# Altium PCB AT32.PcbDoc (part 3 of 9)
Units mm, origin at the board's own origin, x right, y up, seen from the top; angles counter-clockwise.
Board outline 152.1 x 84.6 mm, 2 copper layers (Top Layer, Bottom Layer); 49 components, 58 nets, 223 pads, 0 vias.
Unrouted connection lines stored in the file: 3.
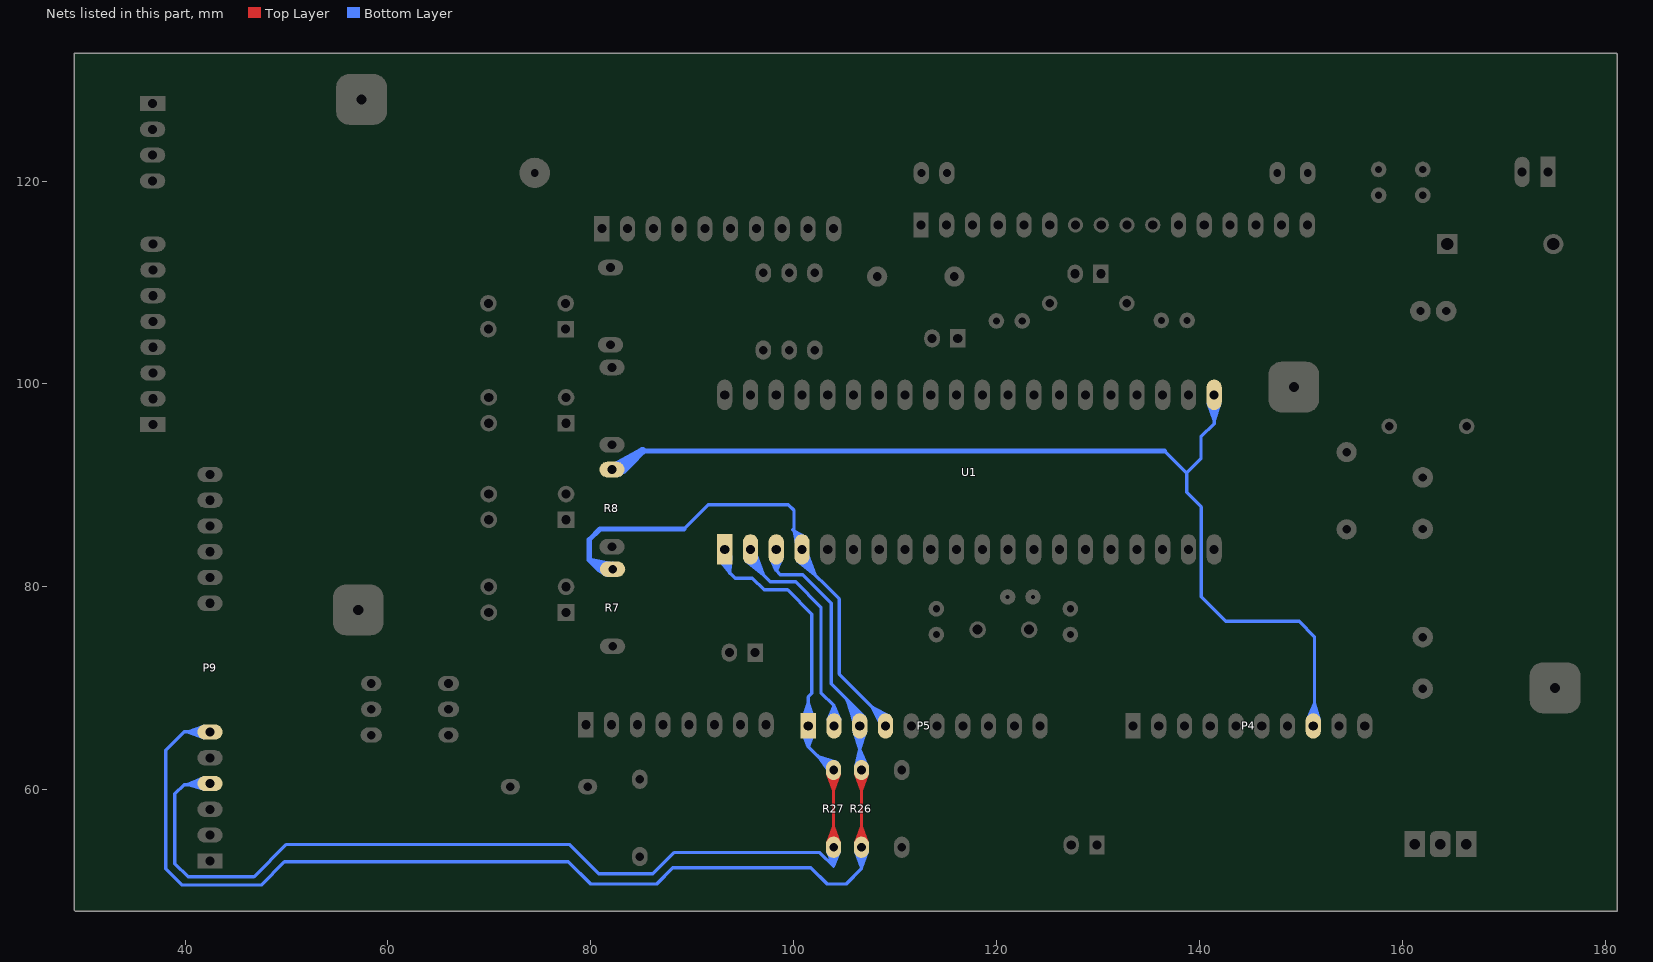
[diagram p3: the nets of this part, all layers, seen from the top]

## Nets (pads, with @x,y where several pads share a name; then routed paths per layer and width w, separated by ;. In a path a pad name is that pad's centre, name@x,y a point inside that pad or via, vN(x,y) a via of type N, cw(c..) or ccw(c..) an arc to the next point about the centre after c; other vN are vias at no path point) (continued)
NetP4_8: P4.8 R8.1 U1.21 | length 277.8
  Bottom Layer w0.33: R8.1@82.092,91.966 R8.1@82.558,91.5 ; 136.541,93.4 138.747,91.194 138.747,89.314 140.186,87.875 140.186,79.026 142.62,76.592 149.857,76.592 151.35,75.099 P4.8@151.35,66.312 ; 138.82,91.294 140.166,92.639 140.166,94.786 141.466,96.086 U1.21@141.466,98.927 ; U1.21@141.052,97.763 cw(c140.054,96.765) 141.466,96.765 cw(c142.878,96.765) U1.21@141.88,97.763 ; P4.8@150.822,67.2 ccw(c149.548,68.474) 151.35,68.474 ; P4.8@151.056,66.966 ccw(c150.345,67.677) 151.35,67.677 ; 151.35,67.923 ccw(c152.373,67.923) P4.8@151.65,67.2 ; U1.21@140.889,98.079 141.466,96.437 ; U1.21@140.889,98.079 141.466,96.437 ; U1.21@140.889,98.079 141.466,96.437 ; U1.21@140.889,98.079 141.466,96.437 ; U1.21@140.889,98.079 141.466,96.437 ; U1.21@140.889,98.079 141.466,96.437 ; U1.21@140.889,98.079 141.466,96.437 ; U1.21@141.212,98.158 141.466,96.437 ; U1.21@141.212,98.158 141.466,96.437 ; U1.21@141.212,98.158 141.466,96.437 ; U1.21@141.212,98.158 141.466,96.437 ; U1.21@141.212,98.158 141.466,96.437 ; U1.21@141.212,98.158 141.466,96.437 ; U1.21@141.212,98.158 141.466,96.437 ; 141.466,96.437 U1.21@142.043,98.079 ; 141.466,96.437 U1.21@141.72,98.158 ; 141.466,96.437 U1.21@141.466,98.177 ; 141.466,96.437 U1.21@142.043,98.079 ; 141.466,96.437 U1.21@141.72,98.158 ; 141.466,96.437 U1.21@141.466,98.177 ; 141.466,96.437 U1.21@142.043,98.079 ; 141.466,96.437 U1.21@141.72,98.158 ; 141.466,96.437 U1.21@141.466,98.177 ; 141.466,96.437 U1.21@142.043,98.079 ; 141.466,96.437 U1.21@141.72,98.158 ; 141.466,96.437 U1.21@141.466,98.177 ; 141.466,96.437 U1.21@142.043,98.079 ; 141.466,96.437 U1.21@141.72,98.158 ; 141.466,96.437 U1.21@141.466,98.177 ; 141.466,96.437 U1.21@142.043,98.079 ; 141.466,96.437 U1.21@141.72,98.158 ; 141.466,96.437 U1.21@141.466,98.177 ; 141.466,96.437 U1.21@142.043,98.079 ; 141.466,96.437 U1.21@141.72,98.158 ; 141.466,96.437 U1.21@141.466,98.177 ; P4.8@150.667,66.921 151.35,68.53 ; P4.8@150.667,66.921 151.35,68.53 ; P4.8@150.667,66.921 151.35,68.53 ; P4.8@150.667,66.922 151.35,68.525 ; P4.8@150.667,66.921 151.35,68.53 ; P4.8@150.667,66.921 151.35,68.53 ; P4.8@150.667,66.921 151.35,68.53 ; P4.8@150.983,66.821 151.35,68.53 ; P4.8@150.983,66.821 151.35,68.53 ; P4.8@150.983,66.821 151.35,68.53 ; P4.8@150.983,66.821 151.35,68.525 ; P4.8@150.983,66.821 151.35,68.53 ; P4.8@150.983,66.821 151.35,68.53 ; P4.8@150.983,66.821 151.35,68.53 ; P4.8@151.236,66.786 151.35,68.53 ; P4.8@151.236,66.786 151.35,68.53 ; P4.8@151.236,66.786 151.35,68.53 ; P4.8@151.236,66.786 151.35,68.525 ; P4.8@151.236,66.786 151.35,68.53 ; P4.8@151.236,66.786 151.35,68.53 ; P4.8@151.236,66.786 151.35,68.53 ; 151.35,68.525 P4.8@151.818,66.846 ; 151.35,68.525 P4.8@151.491,66.788 ; 151.35,68.53 P4.8@151.818,66.846 ; 151.35,68.53 P4.8@151.491,66.788 ; 151.35,68.53 P4.8@151.818,66.846 ; 151.35,68.53 P4.8@151.491,66.788 ; 151.35,68.53 P4.8@151.818,66.846 ; 151.35,68.53 P4.8@151.491,66.788 ; 151.35,68.53 P4.8@151.818,66.846 ; 151.35,68.53 P4.8@151.491,66.788 ; 151.35,68.53 P4.8@151.818,66.846 ; 151.35,68.53 P4.8@151.491,66.788 ; 151.35,68.53 P4.8@151.818,66.846 ; 151.35,68.53 P4.8@151.491,66.788
  Bottom Layer w0.5: 85.1,93.4 136.541,93.4
  Bottom Layer w0.75: R8.1@82.558,91.5 83.2,91.5 85.1,93.4 ; R8.1@82.572,91.961 ccw(c82.572,94.59) 84.431,92.731 ; R8.1@82.361,91.9 85.1,93.4 ; R8.1@82.361,91.9 85.1,93.4 ; R8.1@82.361,91.9 85.1,93.4 ; R8.1@82.361,91.9 85.1,93.4 ; R8.1@82.361,91.9 85.1,93.4 ; R8.1@82.572,91.566 85.1,93.4 ; R8.1@82.572,91.566 85.1,93.4 ; R8.1@82.572,91.566 85.1,93.4 ; R8.1@82.572,91.566 85.1,93.4 ; R8.1@82.572,91.566 85.1,93.4 ; R8.1@82.824,91.262 85.1,93.4 ; R8.1@82.824,91.262 85.1,93.4 ; R8.1@82.824,91.262 85.1,93.4 ; R8.1@82.824,91.262 85.1,93.4 ; R8.1@82.824,91.262 85.1,93.4
NetP5_1: P5.1 P9.4 R27.1 R27.2 U1.1 | length 613.9
  Top Layer w0.33: R27.1@103.526,55.032 ccw(c102.528,56.03) 103.94,56.03 ccw(c105.352,56.03) R27.1@104.354,55.032 ; R27.2@103.526,61.274 cw(c102.528,60.276) 103.94,60.276 cw(c105.352,60.276) R27.2@104.354,61.274 ; R27.1@103.94,54.24 R27.1@103.94,54.318 R27.2@103.94,61.938 ; R27.1@103.363,54.716 103.94,56.358 ; R27.1@103.363,54.716 103.94,56.358 ; R27.1@103.363,54.716 103.94,56.358 ; R27.1@103.363,54.716 103.94,56.358 ; R27.1@103.363,54.716 103.94,56.358 ; R27.1@103.363,54.716 103.94,56.358 ; R27.1@103.363,54.716 103.94,56.358 ; R27.2@103.363,61.59 103.94,59.948 ; R27.2@103.363,61.59 103.94,59.948 ; R27.2@103.363,61.59 103.94,59.948 ; R27.2@103.363,61.59 103.94,59.948 ; R27.2@103.363,61.59 103.94,59.948 ; R27.2@103.363,61.59 103.94,59.948 ; R27.2@103.363,61.59 103.94,59.948 ; R27.1@103.686,54.637 103.94,56.358 ; R27.1@103.686,54.637 103.94,56.358 ; R27.1@103.686,54.637 103.94,56.358 ; R27.1@103.686,54.637 103.94,56.358 ; R27.1@103.686,54.637 103.94,56.358 ; R27.1@103.686,54.637 103.94,56.358 ; R27.1@103.686,54.637 103.94,56.358 ; R27.2@103.686,61.669 103.94,59.948 ; R27.2@103.686,61.669 103.94,59.948 ; R27.2@103.686,61.669 103.94,59.948 ; R27.2@103.686,61.669 103.94,59.948 ; R27.2@103.686,61.669 103.94,59.948 ; R27.2@103.686,61.669 103.94,59.948 ; R27.2@103.686,61.669 103.94,59.948 ; R27.1@103.94,54.618 103.94,56.358 ; R27.1@103.94,54.618 103.94,56.358 ; R27.1@103.94,54.618 103.94,56.358 ; R27.1@103.94,54.618 103.94,56.358 ; R27.1@103.94,54.618 103.94,56.358 ; R27.1@103.94,54.618 103.94,56.358 ; R27.1@103.94,54.618 103.94,56.358 ; 103.94,56.358 R27.1@104.517,54.716 ; 103.94,56.358 R27.1@104.194,54.637 ; 103.94,56.358 R27.1@104.517,54.716 ; 103.94,56.358 R27.1@104.194,54.637 ; 103.94,56.358 R27.1@104.517,54.716 ; 103.94,56.358 R27.1@104.194,54.637 ; 103.94,56.358 R27.1@104.517,54.716 ; 103.94,56.358 R27.1@104.194,54.637 ; 103.94,56.358 R27.1@104.517,54.716 ; 103.94,56.358 R27.1@104.194,54.637 ; 103.94,56.358 R27.1@104.517,54.716 ; 103.94,56.358 R27.1@104.194,54.637 ; 103.94,56.358 R27.1@104.517,54.716 ; 103.94,56.358 R27.1@104.194,54.637 ; 103.94,59.948 R27.2@104.517,61.59 ; 103.94,59.948 R27.2@104.194,61.669 ; 103.94,59.948 R27.2@103.94,61.688 ; 103.94,59.948 R27.2@104.517,61.59 ; 103.94,59.948 R27.2@104.194,61.669 ; 103.94,59.948 R27.2@103.94,61.688 ; 103.94,59.948 R27.2@104.517,61.59 ; 103.94,59.948 R27.2@104.194,61.669 ; 103.94,59.948 R27.2@103.94,61.688 ; 103.94,59.948 R27.2@104.517,61.59 ; 103.94,59.948 R27.2@104.194,61.669 ; 103.94,59.948 R27.2@103.94,61.688 ; 103.94,59.948 R27.2@104.517,61.59 ; 103.94,59.948 R27.2@104.194,61.669 ; 103.94,59.948 R27.2@103.94,61.688 ; 103.94,59.948 R27.2@104.517,61.59 ; 103.94,59.948 R27.2@104.194,61.669 ; 103.94,59.948 R27.2@103.94,61.688 ; 103.94,59.948 R27.2@104.517,61.59 ; 103.94,59.948 R27.2@104.194,61.669 ; 103.94,59.948 R27.2@103.94,61.688
  Bottom Layer w0.33: 40.306,60.5 ccw(c40.306,62.254) P9.4@41.546,61.014 ; 40.789,60.5 cw(c40.789,59.429) P9.4@41.546,60.186 ; 41.103,60.5 ccw(c41.103,61.457) P9.4@41.78,60.78 ; P9.4@42.7,60.6 42.6,60.5 39.9,60.5 39,59.6 39,52.7 40.3,51.4 46.8,51.4 50,54.6 77.9,54.6 80.8,51.7 86.1,51.7 88.2,53.8 102.58,53.8 103.94,52.44 ; U1.1@92.982,82.396 cw(c92.538,81.323) 93.7,81.323 ; U1.1@93.108,82.701 cw(c92.742,81.816) 93.7,81.816 ; U1.1@93.14,83.806 93.7,83.246 93.7,81.4 ; U1.1@93.235,83.006 cw(c92.946,82.31) U1.1@93.7,82.31 ; P5.1@101.032,65.372 cw(c100.034,64.374) 101.446,64.374 cw(c102.858,64.374) P5.1@101.86,65.372 ; P5.1@101.032,67.2 ccw(c100.034,68.198) 101.446,68.198 ccw(c102.858,68.198) P5.1@101.86,67.2 ; 102.211,63.489 ccw(c103.94,65.219) R27.2@103.94,62.773 ; 102.774,62.926 ccw(c103.94,64.092) R27.2@103.94,62.443 ; R27.1@103.526,53.604 cw(c102.528,52.606) 103.94,52.606 cw(c105.352,52.606) R27.1@104.354,53.604 ; R27.2@103.777,61.992 102.44,63.264 ; R27.2@103.9,61.8 101.446,64.254 ; R27.1@103.94,54.318 103.94,52.44 ; R27.2@104.2,62.712 102.446,63.255 ; R27.2@104.201,62.711 102.44,63.264 ; 40.219,60.5 P9.4@41.895,60.019 ; 40.219,60.5 P9.4@41.829,61.17 ; 40.219,60.5 P9.4@41.956,60.345 ; 40.219,60.5 P9.4@41.927,60.853 ; 40.219,60.5 P9.4@41.96,60.6 ; 40.219,60.5 P9.4@41.895,60.019 ; 40.219,60.5 P9.4@41.829,61.17 ; 40.219,60.5 P9.4@41.956,60.345 ; 40.219,60.5 P9.4@41.927,60.853 ; 40.219,60.5 P9.4@41.96,60.6 ; 40.219,60.5 P9.4@41.895,60.019 ; 40.219,60.5 P9.4@41.829,61.17 ; 40.219,60.5 P9.4@41.956,60.345 ; 40.219,60.5 P9.4@41.927,60.853 ; 40.219,60.5 P9.4@41.96,60.6 ; 40.219,60.5 P9.4@41.895,60.019 ; 40.219,60.5 P9.4@41.829,61.17 ; 40.219,60.5 P9.4@41.956,60.345 ; 40.219,60.5 P9.4@41.927,60.853 ; 40.219,60.5 P9.4@41.96,60.6 ; 40.219,60.5 P9.4@41.895,60.019 ; 40.219,60.5 P9.4@41.829,61.17 ; 40.219,60.5 P9.4@41.956,60.345 ; 40.219,60.5 P9.4@41.927,60.853 ; 40.219,60.5 P9.4@41.96,60.6 ; 40.219,60.5 P9.4@41.895,60.019 ; 40.219,60.5 P9.4@41.829,61.17 ; 40.219,60.5 P9.4@41.956,60.345 ; 40.219,60.5 P9.4@41.927,60.853 ; 40.219,60.5 P9.4@41.96,60.6 ; 40.221,60.5 P9.4@41.895,60.019 ; 40.221,60.5 P9.4@41.829,61.17 ; 40.221,60.5 P9.4@41.956,60.345 ; 40.221,60.5 P9.4@41.927,60.853 ; 40.221,60.5 P9.4@41.96,60.6 ; U1.1@92.691,82.66 93.7,81.4 ; U1.1@92.691,82.66 93.7,81.4 ; U1.1@92.691,82.66 93.7,81.4 ; U1.1@92.691,82.66 93.7,81.4 ; U1.1@92.691,82.66 93.7,81.4 ; U1.1@92.691,82.66 93.7,81.4 ; U1.1@92.691,82.66 93.7,81.4 ; U1.1@92.97,82.84 93.7,81.4 ; U1.1@92.97,82.84 93.7,81.4 ; U1.1@92.97,82.84 93.7,81.4 ; U1.1@92.97,82.84 93.7,81.4 ; U1.1@92.97,82.84 93.7,81.4 ; U1.1@92.97,82.84 93.7,81.4 ; U1.1@92.97,82.84 93.7,81.4 ; U1.1@93.206,82.937 93.7,81.4 ; U1.1@93.206,82.937 93.7,81.4 ; U1.1@93.206,82.937 93.7,81.4 ; U1.1@93.206,82.937 93.7,81.4 ; U1.1@93.206,82.937 93.7,81.4 ; U1.1@93.206,82.937 93.7,81.4 ; U1.1@93.206,82.937 93.7,81.4 ; U1.1@93.454,82.996 93.7,81.4 ; U1.1@93.454,82.996 93.7,81.4 ; U1.1@93.454,82.996 93.7,81.4 ; U1.1@93.454,82.996 93.7,81.4 ; U1.1@93.454,82.996 93.7,81.4 ; U1.1@93.454,82.996 93.7,81.4 ; U1.1@93.454,82.996 93.7,81.4 ; 93.7,81.4 94.24,80.86 95.94,80.86 97.1,79.7 99.4,79.7 101.8,77.3 101.8,69.494 101.446,69.14 P5.1@101.446,66.286 101.446,64.254 ; 93.7,81.4 U1.1@93.786,83.012 ; 93.7,81.4 U1.1@93.786,83.012 ; 93.7,81.4 U1.1@93.786,83.012 ; 93.7,81.4 U1.1@93.786,83.012 ; 93.7,81.4 U1.1@93.786,83.012 ; 93.7,81.4 U1.1@93.786,83.012 ; 93.7,81.4 U1.1@93.786,83.012 ; P5.1@100.869,66.884 101.446,68.526 ; P5.1@100.869,66.884 101.446,68.526 ; P5.1@100.869,66.884 101.446,68.526 ; P5.1@100.869,66.884 101.446,68.526 ; P5.1@100.869,66.884 101.446,68.526 ; P5.1@100.869,66.884 101.446,68.526 ; P5.1@100.869,66.884 101.446,68.526 ; P5.1@100.872,65.674 101.446,64.254 ; P5.1@100.872,65.674 101.446,64.254 ; P5.1@100.872,65.674 101.446,64.254 ; P5.1@100.872,65.674 101.446,64.254 ; P5.1@100.872,65.674 101.446,64.254 ; P5.1@100.872,65.674 101.446,64.254 ; P5.1@100.872,65.674 101.446,64.254 ; P5.1@101.192,65.765 101.446,64.254 ; P5.1@101.192,65.765 101.446,64.254 ; P5.1@101.192,65.765 101.446,64.254 ; P5.1@101.192,65.765 101.446,64.254 ; P5.1@101.192,65.765 101.446,64.254 ; P5.1@101.192,65.765 101.446,64.254 ; P5.1@101.192,65.765 101.446,64.254 ; P5.1@101.192,66.805 101.446,68.526 ; P5.1@101.192,66.805 101.446,68.526 ; P5.1@101.192,66.805 101.446,68.526 ; P5.1@101.192,66.805 101.446,68.526 ; P5.1@101.192,66.805 101.446,68.526 ; P5.1@101.192,66.805 101.446,68.526 ; P5.1@101.192,66.805 101.446,68.526 ; 101.446,64.254 P5.1@102.02,65.674 ; 101.446,64.254 P5.1@101.7,65.765 ; 101.446,64.254 P5.1@101.446,65.786 ; 101.446,64.254 P5.1@102.02,65.674 ; 101.446,64.254 P5.1@101.7,65.765 ; 101.446,64.254 P5.1@101.446,65.786 ; 101.446,64.254 P5.1@102.02,65.674 ; 101.446,64.254 P5.1@101.7,65.765 ; 101.446,64.254 P5.1@101.446,65.786 ; 101.446,64.254 P5.1@102.02,65.674 ; 101.446,64.254 P5.1@101.7,65.765 ; 101.446,64.254 P5.1@101.446,65.786 ; 101.446,64.254 P5.1@102.02,65.674 ; 101.446,64.254 P5.1@101.7,65.765 ; 101.446,64.254 P5.1@101.446,65.786 ; 101.446,64.254 P5.1@102.02,65.674 ; 101.446,64.254 P5.1@101.7,65.765 ; 101.446,64.254 P5.1@101.446,65.786 ; 101.446,64.254 P5.1@102.02,65.674 ; 101.446,64.254 P5.1@101.7,65.765 ; 101.446,64.254 P5.1@101.446,65.786 ; P5.1@101.446,66.786 101.446,68.526 ; P5.1@101.446,66.786 101.446,68.526 ; P5.1@101.446,66.786 101.446,68.526 ; P5.1@101.446,66.786 101.446,68.526 ; P5.1@101.446,66.786 101.446,68.526 ; P5.1@101.446,66.786 101.446,68.526 ; P5.1@101.446,66.786 101.446,68.526 ; 101.446,68.526 P5.1@102.023,66.884 ; 101.446,68.526 P5.1@101.7,66.805 ; 101.446,68.526 P5.1@102.023,66.884 ; 101.446,68.526 P5.1@101.7,66.805 ; 101.446,68.526 P5.1@102.023,66.884 ; 101.446,68.526 P5.1@101.7,66.805 ; 101.446,68.526 P5.1@102.023,66.884 ; 101.446,68.526 P5.1@101.7,66.805 ; 101.446,68.526 P5.1@102.023,66.884 ; 101.446,68.526 P5.1@101.7,66.805 ; 101.446,68.526 P5.1@102.023,66.884 ; 101.446,68.526 P5.1@101.7,66.805 ; 101.446,68.526 P5.1@102.023,66.884 ; 101.446,68.526 P5.1@101.7,66.805 ; 102.425,63.275 R27.2@103.529,61.772 ; 102.425,63.275 R27.2@104.202,62.711 ; 102.425,63.275 R27.2@103.778,61.991 ; 102.425,63.275 R27.2@104.074,62.405 ; 102.425,63.275 R27.2@103.94,62.188 ; 102.425,63.275 R27.2@103.529,61.772 ; 102.425,63.275 R27.2@104.202,62.711 ; 102.425,63.275 R27.2@103.778,61.991 ; 102.425,63.275 R27.2@104.074,62.405 ; 102.425,63.275 R27.2@103.94,62.188 ; 102.425,63.275 R27.2@103.529,61.772 ; 102.425,63.275 R27.2@104.202,62.711 ; 102.425,63.275 R27.2@103.778,61.991 ; 102.425,63.275 R27.2@104.074,62.405 ; 102.425,63.275 R27.2@103.94,62.188 ; 102.425,63.275 R27.2@103.529,61.772 ; 102.425,63.275 R27.2@104.202,62.711 ; 102.425,63.275 R27.2@103.778,61.991 ; 102.425,63.275 R27.2@104.074,62.405 ; 102.425,63.275 R27.2@103.94,62.188 ; 102.425,63.275 R27.2@103.529,61.772 ; 102.425,63.275 R27.2@104.202,62.711 ; 102.425,63.275 R27.2@103.778,61.991 ; 102.425,63.275 R27.2@104.074,62.405 ; 102.425,63.275 R27.2@103.94,62.188 ; 102.44,63.264 103.528,61.773 102.446,63.255 ; 102.44,63.264 R27.2@104.074,62.405 ; 102.44,63.264 R27.2@103.94,62.188 ; 102.446,63.255 R27.2@103.778,61.991 ; 102.446,63.255 R27.2@104.073,62.405 ; 102.446,63.255 R27.2@103.94,62.188 ; R27.1@103.365,53.91 103.94,52.44 ; R27.1@103.365,53.91 103.94,52.44 ; R27.1@103.365,53.91 103.94,52.44 ; R27.1@103.365,53.91 103.94,52.44 ; R27.1@103.365,53.91 103.94,52.44 ; R27.1@103.365,53.91 103.94,52.44 ; R27.1@103.365,53.91 103.94,52.44 ; R27.1@103.686,53.997 103.94,52.44 ; R27.1@103.686,53.997 103.94,52.44 ; R27.1@103.686,53.997 103.94,52.44 ; R27.1@103.686,53.997 103.94,52.44 ; R27.1@103.686,53.997 103.94,52.44 ; R27.1@103.686,53.997 103.94,52.44 ; R27.1@103.686,53.997 103.94,52.44 ; 103.94,52.44 R27.1@104.515,53.91 ; 103.94,52.44 R27.1@104.194,53.997 ; 103.94,52.44 R27.1@103.94,54.018 ; 103.94,52.44 R27.1@104.515,53.91 ; 103.94,52.44 R27.1@104.194,53.997 ; 103.94,52.44 R27.1@103.94,54.018 ; 103.94,52.44 R27.1@104.515,53.91 ; 103.94,52.44 R27.1@104.194,53.997 ; 103.94,52.44 R27.1@103.94,54.018 ; 103.94,52.44 R27.1@104.515,53.91 ; 103.94,52.44 R27.1@104.194,53.997 ; 103.94,52.44 R27.1@103.94,54.018 ; 103.94,52.44 R27.1@104.515,53.91 ; 103.94,52.44 R27.1@104.194,53.997 ; 103.94,52.44 R27.1@103.94,54.018 ; 103.94,52.44 R27.1@104.515,53.91 ; 103.94,52.44 R27.1@104.194,53.997 ; 103.94,52.44 R27.1@103.94,54.018 ; 103.94,52.44 R27.1@104.515,53.91 ; 103.94,52.44 R27.1@104.194,53.997 ; 103.94,52.44 R27.1@103.94,54.018
NetP5_2: P5.2 U1.2 | length 154.3
  Bottom Layer w0.33: U1.2@95.327,82.528 96.939,81.297 ; U1.2@95.333,82.523 96.941,81.332 ; U1.2@95.337,82.519 96.971,81.331 ; U1.2@95.548,82.776 96.965,81.24 ; U1.2@95.55,82.774 96.939,81.297 ; U1.2@95.552,82.772 96.941,81.332 ; U1.2@95.553,82.77 96.971,81.331 ; U1.2@95.746,82.646 U1.2@95.746,83.687 ; U1.2@95.893,83.996 95.893,82.307 97.7,80.5 100.2,80.5 102.7,78 102.7,69.546 103.986,68.26 ; U1.2@95.958,83.079 96.971,81.331 ; U1.2@95.96,83.076 96.941,81.332 ; U1.2@96.001,82.937 ccw(c97.783,82.937) 96.523,81.677 ; U1.2@96.258,83.221 96.971,81.331 ; U1.2@96.264,83.209 96.939,81.297 ; U1.2@96.264,83.209 96.965,81.24 ; U1.2@96.331,82.937 ccw(c98.909,82.937) 97.086,81.114 ; P5.2@103.572,67.2 ccw(c102.574,68.198) 103.986,68.198 ccw(c105.398,68.198) P5.2@104.4,67.2 ; P5.2@103.986,66.286 103.986,68.26 ; U1.2@95.323,82.533 97.034,81.166 ; U1.2@95.323,82.533 97.034,81.166 ; U1.2@95.323,82.533 97.034,81.166 ; U1.2@95.323,82.532 96.965,81.24 ; U1.2@95.549,82.775 97.034,81.166 ; U1.2@95.549,82.775 97.034,81.166 ; U1.2@95.549,82.775 97.034,81.166 ; U1.2@95.746,82.937 97.034,81.166 ; U1.2@95.746,82.937 97.034,81.166 ; U1.2@95.746,82.937 96.971,81.331 ; U1.2@95.746,82.937 96.941,81.332 ; U1.2@95.746,82.937 97.034,81.166 ; U1.2@95.746,82.937 96.965,81.24 ; U1.2@95.746,82.937 96.939,81.297 ; U1.2@95.961,83.075 97.034,81.166 ; U1.2@95.961,83.075 97.034,81.166 ; U1.2@95.961,83.075 97.034,81.166 ; U1.2@96.261,83.215 97.034,81.166 ; U1.2@96.261,83.215 97.034,81.166 ; U1.2@96.261,83.214 96.941,81.332 ; U1.2@96.261,83.215 97.034,81.166 ; 96.939,81.297 95.961,83.074 96.965,81.24 ; P5.2@103.413,66.902 103.986,68.26 ; P5.2@103.413,66.902 103.986,68.26 ; P5.2@103.413,66.902 103.986,68.26 ; P5.2@103.413,66.902 103.986,68.26 ; P5.2@103.413,66.902 103.986,68.26 ; P5.2@103.413,66.902 103.986,68.26 ; P5.2@103.413,66.902 103.986,68.26 ; P5.2@103.732,66.808 103.986,68.26 ; P5.2@103.732,66.808 103.986,68.26 ; P5.2@103.732,66.808 103.986,68.26 ; P5.2@103.732,66.808 103.986,68.26 ; P5.2@103.732,66.808 103.986,68.26 ; P5.2@103.732,66.808 103.986,68.26 ; P5.2@103.732,66.808 103.986,68.26 ; P5.2@103.986,66.786 103.986,68.26 ; P5.2@103.986,66.786 103.986,68.26 ; P5.2@103.986,66.786 103.986,68.26 ; P5.2@103.986,66.786 103.986,68.26 ; P5.2@103.986,66.786 103.986,68.26 ; P5.2@103.986,66.786 103.986,68.26 ; P5.2@103.986,66.786 103.986,68.26 ; 103.986,68.26 P5.2@104.559,66.902 ; 103.986,68.26 P5.2@104.24,66.808 ; 103.986,68.26 P5.2@104.559,66.902 ; 103.986,68.26 P5.2@104.24,66.808 ; 103.986,68.26 P5.2@104.559,66.902 ; 103.986,68.26 P5.2@104.24,66.808 ; 103.986,68.26 P5.2@104.559,66.902 ; 103.986,68.26 P5.2@104.24,66.808 ; 103.986,68.26 P5.2@104.559,66.902 ; 103.986,68.26 P5.2@104.24,66.808 ; 103.986,68.26 P5.2@104.559,66.902 ; 103.986,68.26 P5.2@104.24,66.808 ; 103.986,68.26 P5.2@104.559,66.902 ; 103.986,68.26 P5.2@104.24,66.808
NetP5_3: P5.3 P9.6 R26.1 R26.2 U1.3 | length 700.9
  Top Layer w0.33: R26.1@106.274,55.032 ccw(c105.276,56.03) 106.688,56.03 ccw(c108.1,56.03) R26.1@107.102,55.032 ; R26.2@106.274,61.274 cw(c105.276,60.276) 106.688,60.276 cw(c108.1,60.276) R26.2@107.102,61.274 ; R26.1@106.688,54.212 R26.1@106.688,54.318 R26.2@106.688,61.938 ; R26.1@106.111,54.716 106.688,56.358 ; R26.1@106.111,54.716 106.688,56.358 ; R26.1@106.111,54.716 106.688,56.358 ; R26.1@106.111,54.716 106.688,56.358 ; R26.1@106.111,54.716 106.688,56.358 ; R26.1@106.111,54.716 106.688,56.358 ; R26.1@106.111,54.716 106.688,56.358 ; R26.2@106.111,61.59 106.688,59.948 ; R26.2@106.111,61.59 106.688,59.948 ; R26.2@106.111,61.59 106.688,59.948 ; R26.2@106.111,61.59 106.688,59.948 ; R26.2@106.111,61.59 106.688,59.948 ; R26.2@106.111,61.59 106.688,59.948 ; R26.2@106.111,61.59 106.688,59.948 ; R26.1@106.434,54.637 106.688,56.358 ; R26.1@106.434,54.637 106.688,56.358 ; R26.1@106.434,54.637 106.688,56.358 ; R26.1@106.434,54.637 106.688,56.358 ; R26.1@106.434,54.637 106.688,56.358 ; R26.1@106.434,54.637 106.688,56.358 ; R26.1@106.434,54.637 106.688,56.358 ; R26.2@106.434,61.669 106.688,59.948 ; R26.2@106.434,61.669 106.688,59.948 ; R26.2@106.434,61.669 106.688,59.948 ; R26.2@106.434,61.669 106.688,59.948 ; R26.2@106.434,61.669 106.688,59.948 ; R26.2@106.434,61.669 106.688,59.948 ; R26.2@106.434,61.669 106.688,59.948 ; R26.1@106.688,54.618 106.688,56.358 ; R26.1@106.688,54.618 106.688,56.358 ; R26.1@106.688,54.618 106.688,56.358 ; R26.1@106.688,54.618 106.688,56.358 ; R26.1@106.688,54.618 106.688,56.358 ; R26.1@106.688,54.618 106.688,56.358 ; R26.1@106.688,54.618 106.688,56.358 ; 106.688,56.358 R26.1@107.265,54.716 ; 106.688,56.358 R26.1@106.942,54.637 ; 106.688,56.358 R26.1@107.265,54.716 ; 106.688,56.358 R26.1@106.942,54.637 ; 106.688,56.358 R26.1@107.265,54.716 ; 106.688,56.358 R26.1@106.942,54.637 ; 106.688,56.358 R26.1@107.265,54.716 ; 106.688,56.358 R26.1@106.942,54.637 ; 106.688,56.358 R26.1@107.265,54.716 ; 106.688,56.358 R26.1@106.942,54.637 ; 106.688,56.358 R26.1@107.265,54.716 ; 106.688,56.358 R26.1@106.942,54.637 ; 106.688,56.358 R26.1@107.265,54.716 ; 106.688,56.358 R26.1@106.942,54.637 ; 106.688,59.948 R26.2@107.265,61.59 ; 106.688,59.948 R26.2@106.942,61.669 ; 106.688,59.948 R26.2@106.688,61.688 ; 106.688,59.948 R26.2@107.265,61.59 ; 106.688,59.948 R26.2@106.942,61.669 ; 106.688,59.948 R26.2@106.688,61.688 ; 106.688,59.948 R26.2@107.265,61.59 ; 106.688,59.948 R26.2@106.942,61.669 ; 106.688,59.948 R26.2@106.688,61.688 ; 106.688,59.948 R26.2@107.265,61.59 ; 106.688,59.948 R26.2@106.942,61.669 ; 106.688,59.948 R26.2@106.688,61.688 ; 106.688,59.948 R26.2@107.265,61.59 ; 106.688,59.948 R26.2@106.942,61.669 ; 106.688,59.948 R26.2@106.688,61.688 ; 106.688,59.948 R26.2@107.265,61.59 ; 106.688,59.948 R26.2@106.942,61.669 ; 106.688,59.948 R26.2@106.688,61.688 ; 106.688,59.948 R26.2@107.265,61.59 ; 106.688,59.948 R26.2@106.942,61.669 ; 106.688,59.948 R26.2@106.688,61.688
  Bottom Layer w0.33: 40.499,65.7 cw(c40.499,64.219) P9.6@41.546,65.266 ; 40.596,65.7 ccw(c40.596,67.044) P9.6@41.546,66.094 ; P9.6@42.5,65.7 39.9,65.7 38.1,63.9 38.1,52.2 39.7,50.6 47.5,50.6 49.8,52.9 77.8,52.9 80,50.7 86.5,50.7 88.1,52.3 101.7,52.3 103.3,50.7 105.176,50.7 106.688,52.212 R26.1@106.688,54.318 ; U1.3@97.892,82.504 cw(c97.083,81.614) 98.286,81.614 ; U1.3@98.286,83.687 98.286,81.614 ; U1.3@98.68,82.504 ccw(c99.489,81.614) 98.286,81.614 ; 104.938,69.207 cw(c102.518,66.786) P5.3@105.941,66.786 ; 105.502,68.643 cw(c103.645,66.786) P5.3@106.271,66.786 ; P5.3@105.98,66.575 105.489,68.655 ; P5.3@105.981,66.573 105.529,68.533 ; P5.3@105.985,66.563 105.519,68.461 ; P5.3@105.991,66.549 105.481,68.424 ; P5.3@105.999,66.532 105.406,68.44 ; 106.061,68.084 cw(c105.591,67.615) P5.3@106.088,67.174 ; 106.065,68.08 cw(c104.771,66.786) P5.3@106.601,66.786 ; R26.2@106.105,62.233 106.527,63.925 ; P5.3@106.112,65.372 cw(c105.114,64.374) 106.526,64.374 cw(c107.938,64.374) P5.3@106.94,65.372 ; P5.3@106.257,67.305 ccw(c106.068,67.668) 106.477,67.668 ; R26.1@106.274,53.604 cw(c105.276,52.606) 106.688,52.606 cw(c108.1,52.606) R26.1@107.102,53.604 ; R26.2@106.274,62.602 ccw(c105.667,63.209) 106.526,63.209 ; P5.3@106.297,66.674 105.529,68.533 ; P5.3@106.296,66.676 105.489,68.655 ; P5.3@106.299,66.669 105.519,68.461 ; P5.3@106.302,66.663 105.481,68.424 ; P5.3@106.306,66.657 105.406,68.44 ; 106.308,67.837 cw(c105.854,67.382) P5.3@106.335,66.955 ; P5.3@106.477,66.529 106.477,67.668 ; P5.3@106.48,66.332 P5.3@106.526,66.286 106.526,62.174 R26.2@106.7,62 ; 106.526,63.195 ccw(c107.695,63.195) R26.2@106.868,62.368 ; 106.526,63.991 ccw(c108.491,63.991) R26.2@107.102,62.602 ; 106.556,67.589 cw(c106.117,67.149) P5.3@106.582,66.736 ; P5.3@106.712,67.341 cw(c106.822,67.668) 106.477,67.668 ; P5.3@106.728,66.942 105.406,68.44 ; P5.3@106.732,66.937 105.481,68.424 ; P5.3@106.736,66.931 105.519,68.461 ; P5.3@106.739,66.926 105.529,68.533 ; P5.3@106.741,66.923 105.489,68.655 ; P5.3@106.957,67.182 105.406,68.44 ; P5.3@106.966,67.171 105.481,68.424 ; P5.3@106.977,67.159 105.519,68.461 ; P5.3@106.986,67.147 105.529,68.533 ; P5.3@106.994,67.137 105.489,68.655 ; R26.2@107.253,62.339 106.527,63.925 ; 40.22,65.7 P9.6@41.855,65.104 ; 40.22,65.7 P9.6@41.868,66.258 ; 40.22,65.7 P9.6@41.938,65.426 ; 40.22,65.7 P9.6@41.944,65.935 ; 40.22,65.7 P9.6@41.96,65.68 ; 40.22,65.7 P9.6@41.855,65.104 ; 40.22,65.7 P9.6@41.868,66.258 ; 40.22,65.7 P9.6@41.938,65.426 ; 40.22,65.7 P9.6@41.944,65.935 ; 40.22,65.7 P9.6@41.96,65.68 ; 40.22,65.7 P9.6@41.855,65.104 ; 40.22,65.7 P9.6@41.868,66.258 ; 40.22,65.7 P9.6@41.938,65.426 ; 40.22,65.7 P9.6@41.944,65.935 ; 40.22,65.7 P9.6@41.96,65.68 ; 40.22,65.7 P9.6@41.855,65.104 ; 40.22,65.7 P9.6@41.868,66.258 ; 40.22,65.7 P9.6@41.938,65.426 ; 40.22,65.7 P9.6@41.944,65.935 ; 40.22,65.7 P9.6@41.96,65.68 ; 40.22,65.7 P9.6@41.855,65.104 ; 40.22,65.7 P9.6@41.868,66.258 ; 40.22,65.7 P9.6@41.938,65.426 ; 40.22,65.7 P9.6@41.944,65.935 ; 40.22,65.7 P9.6@41.96,65.68 ; 40.22,65.7 P9.6@41.855,65.104 ; 40.22,65.7 P9.6@41.868,66.258 ; 40.22,65.7 P9.6@41.938,65.426 ; 40.22,65.7 P9.6@41.944,65.935 ; 40.22,65.7 P9.6@41.96,65.68 ; 40.22,65.7 P9.6@41.855,65.104 ; 40.22,65.7 P9.6@41.868,66.258 ; 40.22,65.7 P9.6@41.938,65.426 ; 40.22,65.7 P9.6@41.944,65.935 ; 40.22,65.7 P9.6@41.96,65.68 ; U1.3@97.715,82.808 98.286,81.614 ; U1.3@97.715,82.808 98.286,81.614 ; U1.3@97.715,82.808 98.286,81.614 ; U1.3@97.715,82.808 98.286,81.614 ; U1.3@97.715,82.808 98.286,81.614 ; U1.3@97.715,82.808 98.286,81.614 ; U1.3@97.715,82.808 98.286,81.614 ; U1.3@98.032,82.912 98.286,81.614 ; U1.3@98.032,82.912 98.286,81.614 ; U1.3@98.032,82.912 98.286,81.614 ; U1.3@98.032,82.912 98.286,81.614 ; U1.3@98.032,82.912 98.286,81.614 ; U1.3@98.032,82.912 98.286,81.614 ; U1.3@98.032,82.912 98.286,81.614 ; 98.286,81.614 98.7,81.2 100.9,81.2 103.7,78.4 103.7,70.445 106.477,67.668 ; 98.286,81.614 U1.3@98.857,82.808 ; 98.286,81.614 U1.3@98.54,82.912 ; 98.286,81.614 U1.3@98.286,82.937 ; 98.286,81.614 U1.3@98.857,82.808 ; 98.286,81.614 U1.3@98.54,82.912 ; 98.286,81.614 U1.3@98.286,82.937 ; 98.286,81.614 U1.3@98.857,82.808 ; 98.286,81.614 U1.3@98.54,82.912 ; 98.286,81.614 U1.3@98.286,82.937 ; 98.286,81.614 U1.3@98.857,82.808 ; 98.286,81.614 U1.3@98.54,82.912 ; 98.286,81.614 U1.3@98.286,82.937 ; 98.286,81.614 U1.3@98.857,82.808 ; 98.286,81.614 U1.3@98.54,82.912 ; 98.286,81.614 U1.3@98.286,82.937 ; 98.286,81.614 U1.3@98.857,82.808 ; 98.286,81.614 U1.3@98.54,82.912 ; 98.286,81.614 U1.3@98.286,82.937 ; 98.286,81.614 U1.3@98.857,82.808 ; 98.286,81.614 U1.3@98.54,82.912 ; 98.286,81.614 U1.3@98.286,82.937 ; 105.271,68.874 105.992,66.547 105.271,68.874 ; 105.271,68.874 106.988,67.145 105.271,68.874 ; 105.271,68.874 106.301,66.666 105.271,68.874 ; 105.271,68.874 106.737,66.929 105.271,68.874 ; 105.271,68.874 P5.3@106.526,66.786 ; 105.271,68.874 P5.3@106.526,66.786 ; 105.406,68.44 P5.3@106.526,66.786 ; 105.481,68.424 P5.3@106.526,66.786 ; 105.489,68.655 P5.3@106.526,66.786 ; 105.519,68.461 P5.3@106.526,66.786 ; 105.529,68.533 P5.3@106.526,66.786 ; P5.3@105.949,65.688 106.526,64.046 ; P5.3@105.949,65.688 106.526,64.046 ; P5.3@105.949,65.688 106.526,64.046 ; P5.3@105.949,65.688 106.526,64.046 ; P5.3@105.949,65.688 106.526,64.046 ; P5.3@105.949,65.688 106.526,64.046 ; P5.3@105.949,65.688 106.526,64.046 ; P5.3@105.964,66.949 106.477,67.668 ; P5.3@105.964,66.949 106.477,67.668 ; P5.3@105.964,66.949 106.477,67.668 ; P5.3@105.964,66.949 106.477,67.668 ; P5.3@105.964,66.949 106.477,67.668 ; P5.3@105.964,66.949 106.477,67.668 ; P5.3@105.964,66.949 106.477,67.668 ; P5.3@105.964,66.949 106.477,67.668 ; P5.3@105.964,66.949 106.477,67.668 ; P5.3@105.964,66.949 106.477,67.668 ; P5.3@105.964,66.949 106.477,67.668 ; P5.3@105.964,66.949 106.477,67.668 ; P5.3@105.964,66.949 106.477,67.668 ; P5.3@105.964,66.949 106.477,67.668 ; R26.2@106.105,62.232 106.526,63.938 ; R26.2@106.105,62.232 106.526,63.938 ; R26.2@106.105,62.232 106.526,63.938 ; R26.2@106.105,62.232 106.526,63.938 ; R26.2@106.105,62.232 106.526,63.938 ; R26.2@106.105,62.232 106.526,63.938 ; R26.1@106.111,53.92 106.688,52.278 ; R26.1@106.111,53.92 106.688,52.278 ; R26.1@106.111,53.92 106.688,52.278 ; R26.1@106.111,53.92 106.688,52.278 ; R26.1@106.111,53.92 106.688,52.278 ; R26.1@106.111,53.92 106.688,52.278 ; R26.1@106.111,53.92 106.688,52.278 ; P5.3@106.272,65.767 106.526,64.046 ; P5.3@106.272,65.767 106.526,64.046 ; P5.3@106.272,65.767 106.526,64.046 ; P5.3@106.272,65.767 106.526,64.046 ; P5.3@106.272,65.767 106.526,64.046 ; P5.3@106.272,65.767 106.526,64.046 ; P5.3@106.272,65.767 106.526,64.046 ; P5.3@106.272,66.809 106.477,67.668 ; P5.3@106.272,66.809 106.477,67.668 ; P5.3@106.272,66.809 106.477,67.668 ; P5.3@106.272,66.809 106.477,67.668 ; P5.3@106.272,66.809 106.477,67.668 ; P5.3@106.272,66.809 106.477,67.668 ; P5.3@106.272,66.809 106.477,67.668 ; P5.3@106.272,66.809 106.477,67.668 ; P5.3@106.272,66.809 106.477,67.668 ; P5.3@106.272,66.809 106.477,67.668 ; P5.3@106.272,66.809 106.477,67.668 ; P5.3@106.272,66.809 106.477,67.668 ; P5.3@106.272,66.809 106.477,67.668 ; P5.3@106.272,66.809 106.477,67.668 ; R26.1@106.434,53.999 106.688,52.278 ; R26.1@106.434,53.999 106.688,52.278 ; R26.1@106.434,53.999 106.688,52.278 ; R26.1@106.434,53.999 106.688,52.278 ; R26.1@106.434,53.999 106.688,52.278 ; R26.1@106.434,53.999 106.688,52.278 ; R26.1@106.434,53.999 106.688,52.278 ; R26.2@106.433,62.183 106.526,63.938 ; R26.2@106.433,62.183 106.526,63.938 ; R26.2@106.433,62.183 106.526,63.938 ; R26.2@106.433,62.183 106.527,63.925 ; R26.2@106.433,62.183 106.526,63.938 ; R26.2@106.433,62.183 106.526,63.938 ; R26.2@106.433,62.183 106.526,63.938 ; 106.477,67.668 P5.3@107.066,67.01 ; 106.477,67.668 P5.3@106.776,66.837 ; 106.477,67.668 P5.3@106.526,66.786 ; 106.477,67.668 P5.3@107.066,67.01 ; 106.477,67.668 P5.3@106.776,66.837 ; 106.477,67.668 P5.3@106.526,66.786 ; 106.477,67.668 P5.3@107.066,67.01 ; 106.477,67.668 P5.3@106.776,66.837 ; 106.477,67.668 P5.3@106.526,66.786 ; 106.477,67.668 P5.3@107.066,67.01 ; 106.477,67.668 P5.3@106.776,66.837 ; 106.477,67.668 P5.3@106.526,66.786 ; 106.477,67.668 P5.3@107.066,67.01 ; 106.477,67.668 P5.3@106.776,66.837 ; 106.477,67.668 P5.3@106.526,66.786 ; 106.477,67.668 P5.3@107.066,67.01 ; 106.477,67.668 P5.3@106.776,66.837 ; 106.477,67.668 P5.3@106.526,66.786 ; 106.477,67.668 P5.3@107.066,67.01 ; 106.477,67.668 P5.3@106.776,66.837 ; 106.477,67.668 P5.3@106.526,66.786 ; 106.477,67.668 P5.3@107.066,67.01 ; 106.477,67.668 P5.3@106.776,66.837 ; 106.477,67.668 P5.3@106.526,66.786 ; 106.477,67.668 P5.3@107.066,67.01 ; 106.477,67.668 P5.3@106.776,66.837 ; 106.477,67.668 P5.3@106.526,66.786 ; 106.477,67.668 P5.3@107.066,67.01 ; 106.477,67.668 P5.3@106.776,66.837 ; 106.477,67.668 P5.3@106.526,66.786 ; 106.477,67.668 P5.3@107.066,67.01 ; 106.477,67.668 P5.3@106.776,66.837 ; 106.477,67.668 P5.3@106.526,66.786 ; 106.477,67.668 P5.3@107.066,67.01 ; 106.477,67.668 P5.3@106.776,66.837 ; 106.477,67.668 P5.3@106.526,66.786 ; 106.477,67.668 P5.3@107.066,67.01 ; 106.477,67.668 P5.3@106.776,66.837 ; 106.477,67.668 P5.3@106.526,66.786 ; 106.477,67.668 P5.3@107.066,67.01 ; 106.477,67.668 P5.3@106.776,66.837 ; 106.477,67.668 P5.3@106.526,66.786 ; 106.526,63.938 R26.2@107.253,62.338 ; 106.526,63.938 R26.2@106.94,62.23 ; 106.526,63.938 R26.2@106.688,62.188 ; 106.526,63.938 R26.2@107.253,62.338 ; 106.526,63.938 R26.2@106.94,62.23 ; 106.526,63.938 R26.2@106.688,62.188 ; 106.526,63.938 R26.2@107.253,62.338 ; 106.526,63.938 R26.2@106.94,62.23 ; 106.526,63.938 R26.2@106.688,62.188 ; 106.526,63.938 R26.2@107.253,62.338 ; 106.526,63.938 R26.2@106.94,62.23 ; 106.526,63.938 R26.2@106.688,62.188 ; 106.526,63.938 R26.2@107.253,62.338 ; 106.526,63.938 R26.2@106.94,62.23 ; 106.526,63.938 R26.2@106.688,62.188 ; 106.526,63.938 R26.2@107.253,62.338 ; 106.526,63.938 R26.2@106.94,62.23 ; 106.526,63.938 R26.2@106.688,62.188 ; 106.526,64.046 P5.3@107.103,65.688 ; 106.526,64.046 P5.3@106.78,65.767 ; 106.526,64.046 P5.3@106.526,65.786 ; 106.526,64.046 P5.3@107.103,65.688 ; 106.526,64.046 P5.3@106.78,65.767 ; 106.526,64.046 P5.3@106.526,65.786 ; 106.526,64.046 P5.3@107.103,65.688 ; 106.526,64.046 P5.3@106.78,65.767 ; 106.526,64.046 P5.3@106.526,65.786 ; 106.526,64.046 P5.3@107.103,65.688 ; 106.526,64.046 P5.3@106.78,65.767 ; 106.526,64.046 P5.3@106.526,65.786 ; 106.526,64.046 P5.3@107.103,65.688 ; 106.526,64.046 P5.3@106.78,65.767 ; 106.526,64.046 P5.3@106.526,65.786 ; 106.526,64.046 P5.3@107.103,65.688 ; 106.526,64.046 P5.3@106.78,65.767 ; 106.526,64.046 P5.3@106.526,65.786 ; 106.526,64.046 P5.3@107.103,65.688 ; 106.526,64.046 P5.3@106.78,65.767 ; 106.526,64.046 P5.3@106.526,65.786 ; 106.527,63.925 R26.2@106.939,62.23 ; 106.527,63.925 R26.2@106.688,62.188 ; 106.688,52.278 R26.1@107.265,53.92 ; 106.688,52.278 R26.1@106.942,53.999 ; 106.688,52.278 R26.1@106.688,54.018 ; 106.688,52.278 R26.1@107.265,53.92 ; 106.688,52.278 R26.1@106.942,53.999 ; 106.688,52.278 R26.1@106.688,54.018 ; 106.688,52.278 R26.1@107.265,53.92 ; 106.688,52.278 R26.1@106.942,53.999 ; 106.688,52.278 R26.1@106.688,54.018 ; 106.688,52.278 R26.1@107.265,53.92 ; 106.688,52.278 R26.1@106.942,53.999 ; 106.688,52.278 R26.1@106.688,54.018 ; 106.688,52.278 R26.1@107.265,53.92 ; 106.688,52.278 R26.1@106.942,53.999 ; 106.688,52.278 R26.1@106.688,54.018 ; 106.688,52.278 R26.1@107.265,53.92 ; 106.688,52.278 R26.1@106.942,53.999 ; 106.688,52.278 R26.1@106.688,54.018 ; 106.688,52.278 R26.1@107.265,53.92 ; 106.688,52.278 R26.1@106.942,53.999 ; 106.688,52.278 R26.1@106.688,54.018
NetP5_4: P5.4 R7.2 U1.4 | length 302.3
  Bottom Layer w0.33: R7.2@81.506,81.7 R7.2@82.152,82.346 ; 89.168,85.7 91.576,88.109 99.46,88.109 100.038,87.53 100.038,85.503 ; 99.899,85.643 cw(c99.009,84.752) U1.4@100.25,84.537 ; 100.303,85.239 ccw(c100.826,85.761) U1.4@100.826,85.022 ; 100.349,85.193 cw(c99.775,84.619) U1.4@100.575,84.481 ; U1.4@100.406,82.53 102.057,81.245 ; U1.4@100.408,82.528 102.025,81.294 ; U1.4@100.412,82.524 102.021,81.324 ; U1.4@100.414,82.522 102.042,81.319 ; U1.4@100.63,82.774 102.025,81.294 ; U1.4@100.631,82.773 102.021,81.324 ; U1.4@100.632,82.771 102.042,81.319 ; U1.4@101.039,83.077 102.042,81.319 ; U1.4@101.04,83.075 102.021,81.324 ; U1.4@101.081,82.937 ccw(c102.814,82.937) 101.589,81.711 ; U1.4@101.34,83.217 102.042,81.319 ; U1.4@101.343,83.212 102.057,81.245 ; U1.4@101.342,83.213 102.021,81.324 ; U1.4@101.343,83.21 102.025,81.294 ; U1.4@101.411,82.937 ccw(c103.941,82.937) 102.152,81.148 ; 108.033,67.867 cw(c106.953,66.786) P5.4@108.481,66.786 ; 108.149,67.751 ccw(c109.066,68.668) P5.4@109.066,67.371 ; P5.4@109.1,66.8 104.5,71.4 104.5,78.8 100.826,82.474 U1.4@100.826,83.687 100.826,84.716 100.038,85.503 ; 100.038,85.503 U1.4@100.29,84.202 ; 100.038,85.503 U1.4@101.208,84.88 ; 100.038,85.503 U1.4@100.607,84.306 ; 100.038,85.503 U1.4@101.016,84.608 ; 100.038,85.503 U1.4@100.826,84.437 ; 100.038,85.503 U1.4@100.29,84.202 ; 100.038,85.503 U1.4@101.208,84.88 ; 100.038,85.503 U1.4@100.607,84.306 ; 100.038,85.503 U1.4@101.016,84.608 ; 100.038,85.503 U1.4@100.826,84.437 ; 100.038,85.503 U1.4@100.29,84.202 ; 100.038,85.503 U1.4@101.208,84.88 ; 100.038,85.503 U1.4@100.607,84.306 ; 100.038,85.503 U1.4@101.016,84.608 ; 100.038,85.503 U1.4@100.826,84.437 ; 100.038,85.503 U1.4@100.29,84.202 ; 100.038,85.503 U1.4@101.208,84.88 ; 100.038,85.503 U1.4@100.607,84.306 ; 100.038,85.503 U1.4@101.016,84.608 ; 100.038,85.503 U1.4@100.826,84.437 ; 100.038,85.503 U1.4@100.29,84.202 ; 100.038,85.503 U1.4@101.208,84.88 ; 100.038,85.503 U1.4@100.607,84.306 ; 100.038,85.503 U1.4@101.016,84.608 ; 100.038,85.503 U1.4@100.826,84.437 ; 100.038,85.503 U1.4@100.29,84.202 ; 100.038,85.503 U1.4@101.208,84.88 ; 100.038,85.503 U1.4@100.607,84.306 ; 100.038,85.503 U1.4@101.016,84.608 ; 100.038,85.503 U1.4@100.826,84.437 ; 100.038,85.503 U1.4@100.29,84.202 ; 100.038,85.503 U1.4@101.208,84.88 ; 100.038,85.503 U1.4@100.607,84.306 ; 100.038,85.503 U1.4@101.016,84.608 ; 100.038,85.503 U1.4@100.826,84.437 ; U1.4@100.406,82.53 102.078,81.222 ; U1.4@100.406,82.53 102.078,81.222 ; U1.4@100.406,82.53 102.078,81.222 ; U1.4@100.629,82.775 102.078,81.222 ; U1.4@100.629,82.775 102.078,81.222 ; U1.4@100.629,82.775 102.057,81.245 ; U1.4@100.629,82.775 102.078,81.222 ; U1.4@100.826,82.937 102.078,81.222 ; U1.4@100.826,82.937 102.042,81.319 ; U1.4@100.826,82.937 102.021,81.324 ; U1.4@100.826,82.937 102.078,81.222 ; U1.4@100.826,82.937 102.057,81.245 ; U1.4@100.826,82.937 102.025,81.294 ; U1.4@100.826,82.937 102.078,81.222 ; U1.4@101.041,83.075 102.078,81.222 ; U1.4@101.041,83.075 102.078,81.222 ; U1.4@101.041,83.074 102.057,81.245 ; U1.4@101.041,83.074 102.025,81.294 ; U1.4@101.041,83.075 102.078,81.222 ; U1.4@101.341,83.214 102.078,81.222 ; U1.4@101.341,83.214 102.078,81.222 ; U1.4@101.341,83.214 102.078,81.222 ; 107.8,68.1 P5.4@108.585,66.453 ; 107.8,68.1 P5.4@109.417,67.254 ; 107.8,68.1 P5.4@108.87,66.622 ; 107.8,68.1 P5.4@109.237,66.975 ; 107.8,68.1 P5.4@109.066,66.786 ; 107.8,68.1 P5.4@108.585,66.453 ; 107.8,68.1 P5.4@109.417,67.254 ; 107.8,68.1 P5.4@108.87,66.622 ; 107.8,68.1 P5.4@109.237,66.975 ; 107.8,68.1 P5.4@109.066,66.786 ; 107.8,68.1 P5.4@108.585,66.453 ; 107.8,68.1 P5.4@109.417,67.254 ; 107.8,68.1 P5.4@108.87,66.622 ; 107.8,68.1 P5.4@109.237,66.975 ; 107.8,68.1 P5.4@109.066,66.786 ; 107.8,68.1 P5.4@108.585,66.453 ; 107.8,68.1 P5.4@109.417,67.254 ; 107.8,68.1 P5.4@108.87,66.622 ; 107.8,68.1 P5.4@109.237,66.975 ; 107.8,68.1 P5.4@109.066,66.786 ; 107.8,68.1 P5.4@108.585,66.453 ; 107.8,68.1 P5.4@109.417,67.254 ; 107.8,68.1 P5.4@108.87,66.622 ; 107.8,68.1 P5.4@109.237,66.975 ; 107.8,68.1 P5.4@109.066,66.786 ; 107.8,68.1 P5.4@108.585,66.453 ; 107.8,68.1 P5.4@109.417,67.254 ; 107.8,68.1 P5.4@108.87,66.622 ; 107.8,68.1 P5.4@109.237,66.975 ; 107.8,68.1 P5.4@109.066,66.786 ; 107.8,68.1 P5.4@108.585,66.453 ; 107.8,68.1 P5.4@109.417,67.254 ; 107.8,68.1 P5.4@108.87,66.622 ; 107.8,68.1 P5.4@109.237,66.975 ; 107.8,68.1 P5.4@109.066,66.786
  Bottom Layer w0.5: 80.308,82.192 ccw(c80.849,82.733) R7.2@81.339,82.145 ; 80.695,81.805 ccw(c81.201,82.311) R7.2@81.659,81.761 ; R7.2@81.197,81.958 cw(c80.8,82.135) 80.8,81.7 ; R7.2@81.236,81.463 ccw(c80.8,81.181) 80.8,81.7 ; R7.2@81.506,81.7 80.8,81.7 ; 89.168,85.7 80.9,85.7 79.849,84.649 79.849,82.651 ; 79.849,82.651 80.8,81.7 ; 79.849,82.651 R7.2@81.383,81.314 ; 79.849,82.651 R7.2@81.842,82.237 ; 79.849,82.651 R7.2@81.672,81.746 ; 79.849,82.651 R7.2@81.383,81.314 ; 79.849,82.651 R7.2@81.842,82.237 ; 79.849,82.651 R7.2@81.672,81.746 ; 79.849,82.651 R7.2@81.383,81.314 ; 79.849,82.651 R7.2@81.842,82.237 ; 79.849,82.651 R7.2@81.672,81.746 ; 79.849,82.651 R7.2@81.383,81.314 ; 79.849,82.651 R7.2@81.842,82.237 ; 79.849,82.651 R7.2@81.672,81.746 ; 79.849,82.651 R7.2@81.383,81.314 ; 79.849,82.651 R7.2@81.842,82.237 ; 79.849,82.651 R7.2@81.672,81.746 ; 80.8,81.7 R7.2@81.544,81.242 ; 80.8,81.7 R7.2@81.491,82.234 ; 80.8,81.7 R7.2@81.672,81.746 ; 80.8,81.7 R7.2@81.544,81.242 ; 80.8,81.7 R7.2@81.491,82.234 ; 80.8,81.7 R7.2@81.672,81.746 ; 80.8,81.7 R7.2@81.544,81.242 ; 80.8,81.7 R7.2@81.491,82.234 ; 80.8,81.7 R7.2@81.672,81.746 ; 80.8,81.7 R7.2@81.544,81.242 ; 80.8,81.7 R7.2@81.491,82.234 ; 80.8,81.7 R7.2@81.672,81.746 ; 80.8,81.7 R7.2@81.544,81.242 ; 80.8,81.7 R7.2@81.491,82.234 ; 80.8,81.7 R7.2@81.672,81.746 ; 80.8,81.7 R7.2@81.544,81.242 ; 80.8,81.7 R7.2@81.491,82.234 ; 80.8,81.7 R7.2@81.672,81.746 ; 80.8,81.7 R7.2@81.544,81.242 ; 80.8,81.7 R7.2@81.491,82.234 ; 80.8,81.7 R7.2@81.672,81.746 ; 80.8,81.7 R7.2@81.544,81.242 ; 80.8,81.7 R7.2@81.491,82.234 ; 80.8,81.7 R7.2@81.672,81.746 ; 80.8,81.7 R7.2@81.544,81.242 ; 80.8,81.7 R7.2@81.491,82.234 ; 80.8,81.7 R7.2@81.672,81.746 ; 80.8,81.7 R7.2@81.544,81.242 ; 80.8,81.7 R7.2@81.491,82.234 ; 80.8,81.7 R7.2@81.672,81.746